# EAGLE board SimulatorT2SecondPCRevA_panel4 (EAGLE 7.7.0)
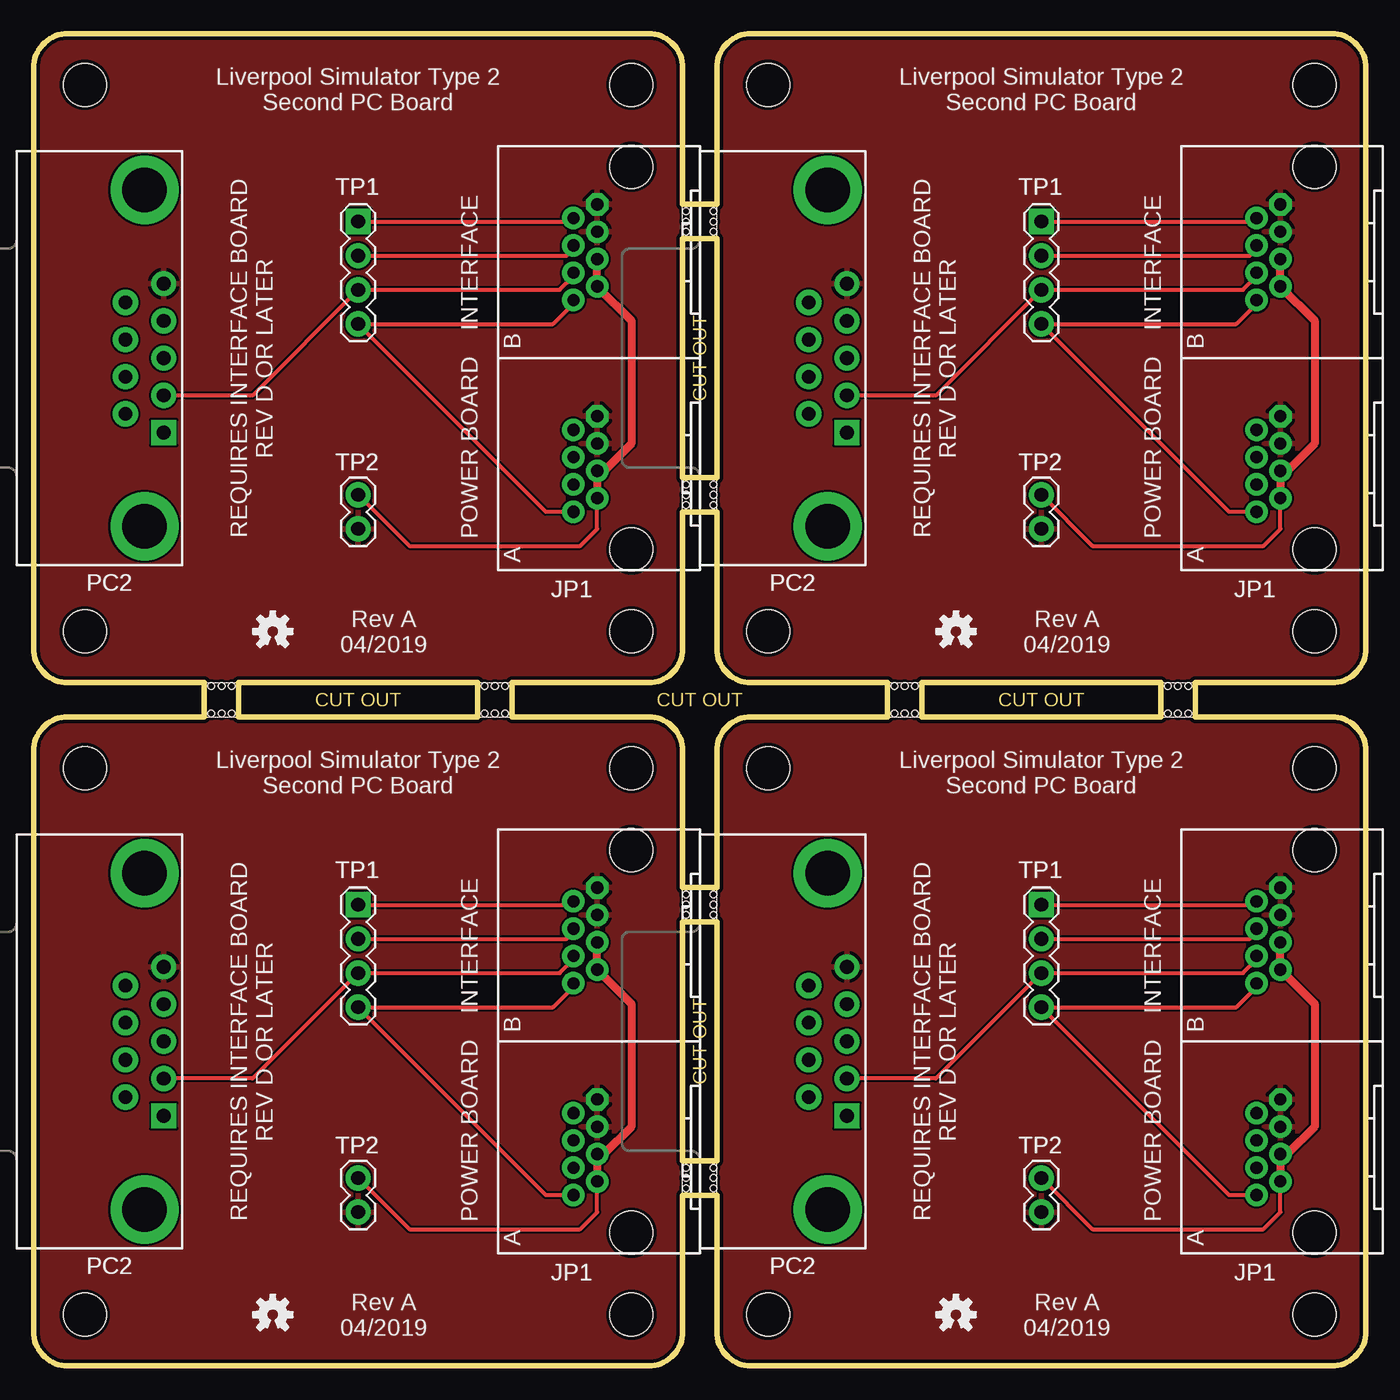
[diagram p0: board, top side]
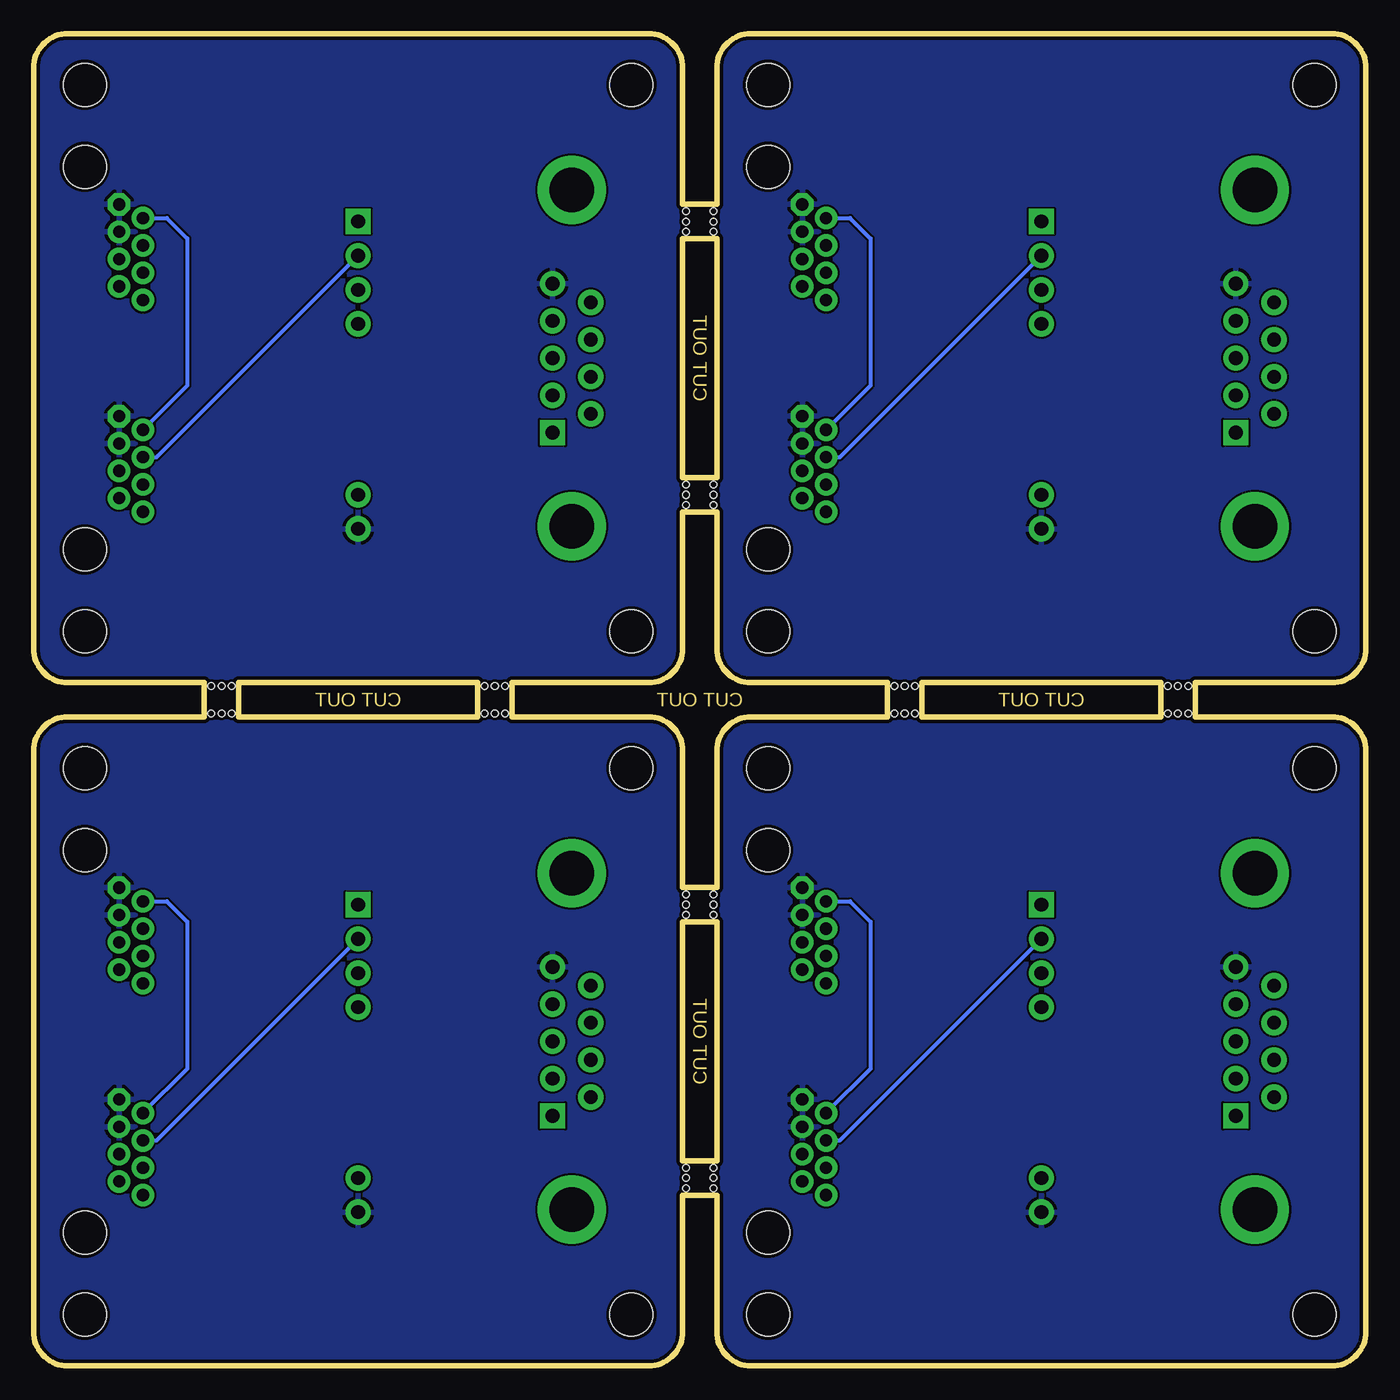
[diagram p1: board, bottom side, seen from below]

Size 99.06 x 99.06 mm. Coordinates in mm from the lower left corner, seen from the top.
Outline: 0,2.54 0,45.72 arc-90 2.54,48.26 12.7,48.26 12.7,50.8 2.54,50.8 arc-90 0,53.34 0,96.52 arc-90 2.54,99.06 45.72,99.06 arc-90 48.26,96.52 48.26,86.36 50.8,86.36 50.8,96.52 arc-90 53.34,99.06 96.52,99.06 arc-90 99.06,96.52 99.06,53.34 arc-90 96.52,50.8 86.36,50.8 86.36,48.26 96.52,48.26 arc-90 99.06,45.72 99.06,2.54 arc-90 96.52,0 53.34,0 arc-90 50.8,2.54 50.8,12.7 48.26,12.7 48.26,2.54 arc-90 45.72,0 2.54,0 arc-90 0,2.54
Outline: 45.72,48.26 arc-90 48.26,45.72 48.26,35.56 50.8,35.56 50.8,45.72 arc-90 53.34,48.26 63.5,48.26 63.5,50.8 53.34,50.8 arc-90 50.8,53.34 50.8,63.5 48.26,63.5 48.26,53.34 arc-90 45.72,50.8 35.56,50.8 35.56,48.26 45.72,48.26
Outline: 15.24,50.8 33.02,50.8 33.02,48.26 15.24,48.26 15.24,50.8
Outline: 66.04,50.8 83.82,50.8 83.82,48.26 66.04,48.26 66.04,50.8
Outline: 48.26,83.82 50.8,83.82 50.8,66.04 48.26,66.04 48.26,83.82
Outline: 50.8,33.02 50.8,15.24 48.26,15.24 48.26,33.02 50.8,33.02
Copper layers (1*16): Top 0.035mm / dielectric 1.5mm / Bottom 0.035mm
Design rules "SeeedStudio_2layer_DRU_no_angle_20140221": minimum track width 6mil, minimum drill 12mil, track to track 6mil, track to pad 6mil, pad to pad 6mil, via to via 6mil, smd to smd 0mil, copper to edge 10mil, drill to drill 10mil, minimum pad ring 10mil, minimum via ring 6mil, stop-mask expansion 2mil, vias tented up to drill 100mil, thermal gap 10mil
Holes 3.2 mm at 3.81,3.81 3.81,44.45 44.45,44.45 44.45,3.81 54.61,3.81 54.61,44.45 95.25,44.45 95.25,3.81 3.81,54.61 3.81,95.25 44.45,95.25 44.45,54.61 54.61,54.61 54.61,95.25 95.25,95.25 95.25,54.61

## Footprints (pad centres in the part's own frame; a part is rotated, then mirrored left to right if it is on the bottom)
STAMP_HOLES = hole 0.5: 0,-1.016; 0.762,-1.016; -0.762,-1.016; -0.762,1.016; 0,1.016; 0.762,1.016
RJ45-RJHSE-5080-02 = drill 0.9 pad 1.676 octagon: A1 -4.318,2.54; B1 11.43,2.54 | drill 0.9 pad 1.676: A2 -5.334,4.318; A3 -6.35,2.54; A4 -7.366,4.318; A5 -8.382,2.54; A6 -9.398,4.318; A7 -10.414,2.54; A8 -11.43,4.318; B2 10.414,4.318; B3 9.398,2.54; B4 8.382,4.318; B5 7.366,2.54; B6 6.35,4.318; B7 5.334,2.54; B8 4.318,4.318 | hole 3.2: -14.224,0; 14.224,0
MULTICOMP-DB9-FEMALE-PCB-90DEG = drill 1.016 pad 1.88 square: 1 -5.54,-10.945 | drill 1.016 pad 1.88: 2 -2.77,-10.945; 3 0,-10.945; 4 2.77,-10.945; 5 5.54,-10.945; 6 -4.15,-8.105; 7 -1.38,-8.105; 8 1.38,-8.105; 9 4.15,-8.105 | drill 3.302 pad 5.08: G1 -12.496,-9.525; G2 12.496,-9.525
1X04 = drill 1.016 pad 1.88 square: 1 0,0 | drill 1.016 pad 1.88: 2 2.54,0; 3 5.08,0; 4 7.62,0
1X02 = drill 1.016 pad 1.88: 1 0,0; 2 2.54,0

## Placement (x,y rotation side)
E$1  [STAMP_HOLES]  13.97,49.53 0 top
E$2  [STAMP_HOLES]  34.29,49.53 0 top
E$3  [STAMP_HOLES]  64.77,49.53 0 top
E$4  [STAMP_HOLES]  85.09,49.53 0 top
E$5  [STAMP_HOLES]  49.53,34.29 90 top
E$6  [STAMP_HOLES]  49.53,13.97 90 top
E$7  [STAMP_HOLES]  49.53,64.77 90 top
E$8  [STAMP_HOLES]  49.53,85.09 90 top
JP1  RJ45-RJHSE-5080-022HOLE  [RJ45-RJHSE-5080-02]  44.45,24.13 90 top
JP1_1  RJ45-RJHSE-5080-022HOLE  [RJ45-RJHSE-5080-02]  95.25,24.13 90 top
JP1_2  RJ45-RJHSE-5080-022HOLE  [RJ45-RJHSE-5080-02]  44.45,74.93 90 top
JP1_3  RJ45-RJHSE-5080-022HOLE  [RJ45-RJHSE-5080-02]  95.25,74.93 90 top
LOGO1  OSHW-LOGOS  [OSHW-LOGO-S]  17.78,3.81 0 top
LOGO1_1  OSHW-LOGOS  [OSHW-LOGO-S]  68.58,3.81 0 top
LOGO1_2  OSHW-LOGOS  [OSHW-LOGO-S]  17.78,54.61 0 top
LOGO1_3  OSHW-LOGOS  [OSHW-LOGO-S]  68.58,54.61 0 top
PC2  [MULTICOMP-DB9-FEMALE-PCB-90DEG]  -1.27,24.13 90 top
PC2_1  [MULTICOMP-DB9-FEMALE-PCB-90DEG]  49.53,24.13 90 top
PC2_2  [MULTICOMP-DB9-FEMALE-PCB-90DEG]  -1.27,74.93 90 top
PC2_3  [MULTICOMP-DB9-FEMALE-PCB-90DEG]  49.53,74.93 90 top
TP1  [1X04]  24.13,34.29 270 top
TP1_1  [1X04]  74.93,34.29 270 top
TP1_2  [1X04]  24.13,85.09 270 top
TP1_3  [1X04]  74.93,85.09 270 top
TP2  [1X02]  24.13,13.97 270 top
TP2_1  [1X02]  74.93,13.97 270 top
TP2_2  [1X02]  24.13,64.77 270 top
TP2_3  [1X02]  74.93,64.77 270 top

## Library data of the parts
E$1-E$8 JP1 PC2 = AIC_Custom
JP1_1-JP1_3 = AIC_Custom; NAME1: JP1
LOGO1 LOGO1_1-LOGO1_3 = SparkFun-Aesthetics
PC2_1-PC2_3 = AIC_Custom; NAME1: PC2
TP1 TP2 = SparkFun-Connectors
TP1_1-TP1_3 = SparkFun-Connectors; NAME1: TP1
TP2_1-TP2_3 = SparkFun-Connectors; NAME1: TP2

## Nets
GND: JP1.A1 JP1.A3 JP1.B1 JP1.B3 PC2.5 TP2.2
GND1: JP1_1.A1 JP1_1.A3 JP1_1.B1 JP1_1.B3 PC2_1.5 TP2_1.2
GND2: JP1_2.A1 JP1_2.A3 JP1_2.B1 JP1_2.B3 PC2_2.5 TP2_2.2
GND3: JP1_3.A1 JP1_3.A3 JP1_3.B1 JP1_3.B3 PC2_3.5 TP2_3.2
P8: JP1.A8 JP1.B8 TP1.4
P81: JP1_1.A8 JP1_1.B8 TP1_1.4
P82: JP1_2.A8 JP1_2.B8 TP1_2.4
P83: JP1_3.A8 JP1_3.B8 TP1_3.4
RXD: JP1.A4 JP1.B4 TP1.2
RXD1: JP1_1.A4 JP1_1.B4 TP1_1.2
RXD2: JP1_2.A4 JP1_2.B4 TP1_2.2
RXD3: JP1_3.A4 JP1_3.B4 TP1_3.2
TX2: JP1.B6 PC2.2 TP1.3
TX21: JP1_1.B6 PC2_1.2 TP1_1.3
TX22: JP1_2.B6 PC2_2.2 TP1_2.3
TX23: JP1_3.B6 PC2_3.2 TP1_3.3
TXD: JP1.A2 JP1.B2 TP1.1
TXD1: JP1_1.A2 JP1_1.B2 TP1_1.1
TXD2: JP1_2.A2 JP1_2.B2 TP1_2.1
TXD3: JP1_3.A2 JP1_3.B2 TP1_3.1
VIN2: JP1.A5 JP1.A7 JP1.B5 JP1.B7 TP2.1
VIN21: JP1_1.A5 JP1_1.A7 JP1_1.B5 JP1_1.B7 TP2_1.1
VIN22: JP1_2.A5 JP1_2.A7 JP1_2.B5 JP1_2.B7 TP2_2.1
VIN23: JP1_3.A5 JP1_3.A7 JP1_3.B5 JP1_3.B7 TP2_3.1

## Tracks (layer width: path | path; a pad name or v marks a point on that pad's centre or on a via)
GND
  pour Bottom: 2.54,48.26 45.72,48.26 arc-90 48.26,45.72 48.26,2.54 arc-90 45.72,0 2.54,0 arc-90 0,2.54 0,45.72 arc-90
  pour Top: 2.54,48.26 45.72,48.26 arc-90 48.26,45.72 48.26,2.54 arc-90 45.72,0 2.54,0 arc-90 0,2.54 0,45.72 arc-90
GND1
  pour Bottom: 53.34,48.26 96.52,48.26 arc-90 99.06,45.72 99.06,2.54 arc-90 96.52,0 53.34,0 arc-90 50.8,2.54 50.8,45.72 arc-90
  pour Top: 53.34,48.26 96.52,48.26 arc-90 99.06,45.72 99.06,2.54 arc-90 96.52,0 53.34,0 arc-90 50.8,2.54 50.8,45.72 arc-90
GND2
  pour Bottom: 2.54,99.06 45.72,99.06 arc-90 48.26,96.52 48.26,53.34 arc-90 45.72,50.8 2.54,50.8 arc-90 0,53.34 0,96.52 arc-90
  pour Top: 2.54,99.06 45.72,99.06 arc-90 48.26,96.52 48.26,53.34 arc-90 45.72,50.8 2.54,50.8 arc-90 0,53.34 0,96.52 arc-90
GND3
  pour Bottom: 53.34,99.06 96.52,99.06 arc-90 99.06,96.52 99.06,53.34 arc-90 96.52,50.8 53.34,50.8 arc-90 50.8,53.34 50.8,96.52 arc-90
  pour Top: 53.34,99.06 96.52,99.06 arc-90 99.06,96.52 99.06,53.34 arc-90 96.52,50.8 53.34,50.8 arc-90 50.8,53.34 50.8,96.52 arc-90
P8
  Top 0.305: JP1.B8 40.13,28.19 38.61,26.67 TP1.4 38.1,12.7 JP1.A8
P81
  Top 0.305: JP1_1.B8 90.93,28.19 89.41,26.67 TP1_1.4 88.9,12.7 JP1_1.A8
P82
  Top 0.305: JP1_2.B8 40.13,78.99 38.61,77.47 TP1_2.4 38.1,63.5 JP1_2.A8
P83
  Top 0.305: JP1_3.B8 90.93,78.99 89.41,77.47 TP1_3.4 88.9,63.5 JP1_3.A8
RXD
  Top 0.305: TP1.2 39.62,31.75 40.13,32.26 JP1.B4
  Bottom 0.305: JP1.A4 39.12,16.76 TP1.2
RXD1
  Top 0.305: TP1_1.2 90.42,31.75 90.93,32.26 JP1_1.B4
  Bottom 0.305: JP1_1.A4 89.92,16.76 TP1_1.2
RXD2
  Top 0.305: TP1_2.2 39.62,82.55 40.13,83.06 JP1_2.B4
  Bottom 0.305: JP1_2.A4 39.12,67.56 TP1_2.2
RXD3
  Top 0.305: TP1_3.2 90.42,82.55 90.93,83.06 JP1_3.B4
  Bottom 0.305: JP1_3.A4 89.92,67.56 TP1_3.2
TX2
  Top 0.305: JP1.B6 40.13,30.23 39.12,29.21 TP1.3 16.28,21.36 PC2.2
TX21
  Top 0.305: JP1_1.B6 90.93,30.23 89.92,29.21 TP1_1.3 67.08,21.36 PC2_1.2
TX22
  Top 0.305: JP1_2.B6 40.13,81.03 39.12,80.01 TP1_2.3 16.28,72.16 PC2_2.2
TX23
  Top 0.305: JP1_3.B6 90.93,81.03 89.92,80.01 TP1_3.3 67.08,72.16 PC2_3.2
TXD
  Top 0.305: TP1.1 39.88,34.29 JP1.B2
  Bottom 0.305: JP1.B2 38.35,34.54 36.83,33.02 36.83,22.1 JP1.A2
TXD1
  Top 0.305: TP1_1.1 90.68,34.29 JP1_1.B2
  Bottom 0.305: JP1_1.B2 89.15,34.54 87.63,33.02 87.63,22.1 JP1_1.A2
TXD2
  Top 0.305: TP1_2.1 39.88,85.09 JP1_2.B2
  Bottom 0.305: JP1_2.B2 38.35,85.34 36.83,83.82 36.83,72.9 JP1_2.A2
TXD3
  Top 0.305: TP1_3.1 90.68,85.09 JP1_3.B2
  Bottom 0.305: JP1_3.B2 89.15,85.34 87.63,83.82 87.63,72.9 JP1_3.A2
VIN2
  Top 0.305: TP2.1 27.94,10.16 40.64,10.16 41.91,11.43 JP1.A7
  Top 0.406: 42.42,15.75 JP1.A5
  Top 0.61: JP1.B5 JP1.B7 44.45,26.92 44.45,17.78 42.42,15.75 | JP1.A5 JP1.A7
VIN21
  Top 0.305: TP2_1.1 78.74,10.16 91.44,10.16 92.71,11.43 JP1_1.A7
  Top 0.406: 93.22,15.75 JP1_1.A5
  Top 0.61: JP1_1.B5 JP1_1.B7 95.25,26.92 95.25,17.78 93.22,15.75 | JP1_1.A5 JP1_1.A7
VIN22
  Top 0.305: TP2_2.1 27.94,60.96 40.64,60.96 41.91,62.23 JP1_2.A7
  Top 0.406: 42.42,66.55 JP1_2.A5
  Top 0.61: JP1_2.B5 JP1_2.B7 44.45,77.72 44.45,68.58 42.42,66.55 | JP1_2.A5 JP1_2.A7
VIN23
  Top 0.305: TP2_3.1 78.74,60.96 91.44,60.96 92.71,62.23 JP1_3.A7
  Top 0.406: 93.22,66.55 JP1_3.A5
  Top 0.61: JP1_3.B5 JP1_3.B7 95.25,77.72 95.25,68.58 93.22,66.55 | JP1_3.A5 JP1_3.A7

## Text on the board
Dimension: CUT OUT | CUT OUT | CUT OUT | CUT OUT | CUT OUT
tPlace: Liverpool Simulator Type 2 / Second PC Board | Liverpool Simulator Type 2 / Second PC Board | REQUIRES INTERFACE BOARD / REV D OR LATER | REQUIRES INTERFACE BOARD / REV D OR LATER | POWER BOARD INTERFACE | POWER BOARD INTERFACE | Rev A / 04/2019 | Rev A / 04/2019 | Liverpool Simulator Type 2 / Second PC Board | Liverpool Simulator Type 2 / Second PC Board | REQUIRES INTERFACE BOARD / REV D OR LATER | REQUIRES INTERFACE BOARD / REV D OR LATER | POWER BOARD INTERFACE | POWER BOARD INTERFACE | Rev A / 04/2019 | Rev A / 04/2019
_tNames: TP1 | TP1 | TP2 | TP2 | PC2 | PC2 | JP1 | JP1 | TP1 | TP1 | TP2 | TP2 | PC2 | PC2 | JP1 | JP1